# Altium PCB PARK_COUNTER_PT1_UN.PcbDoc
Units mil, origin at the board's own origin, x right, y up, seen from the top; angles counter-clockwise.
Board outline 3592.71 x 2570.03 mil, 2 copper layers (Top Layer, Bottom Layer); 61 components, 33 nets, 168 pads, 120 vias.
Unrouted connection lines stored in the file: 10.
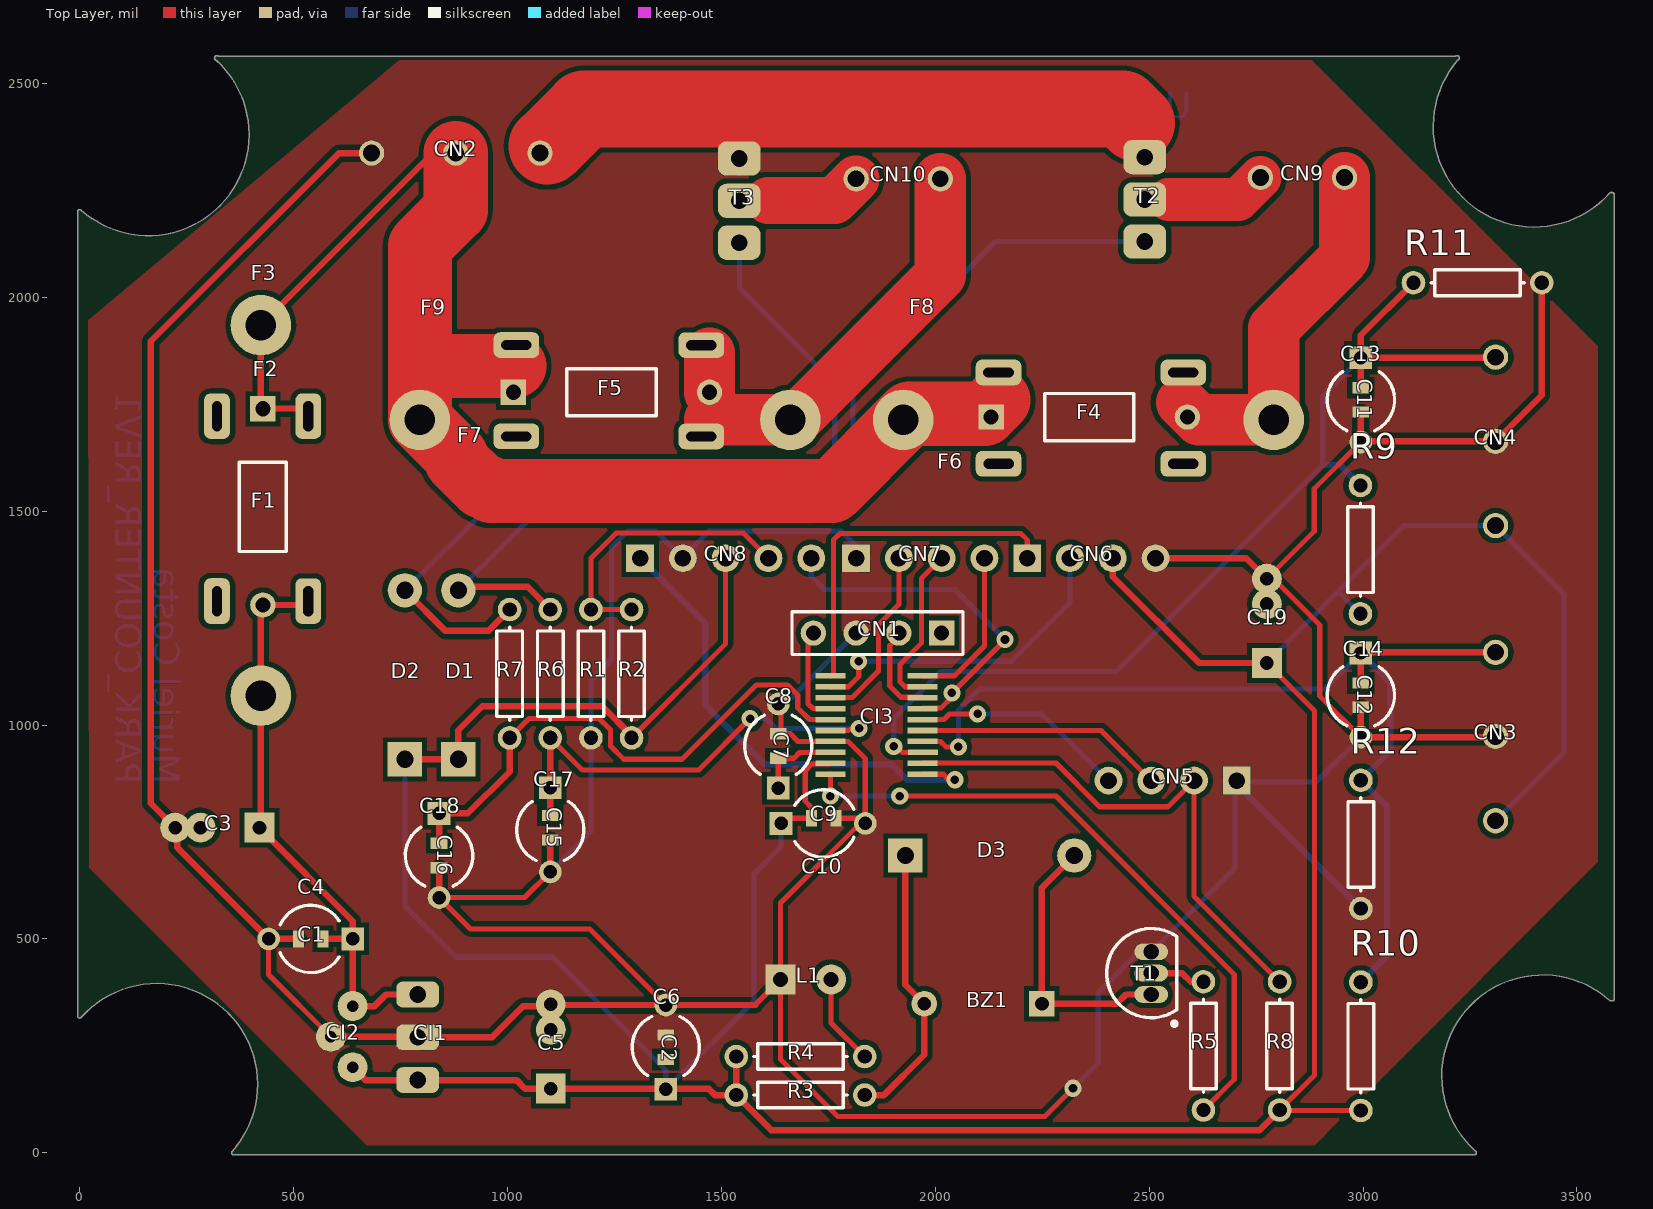
[diagram p0: Top Layer view]
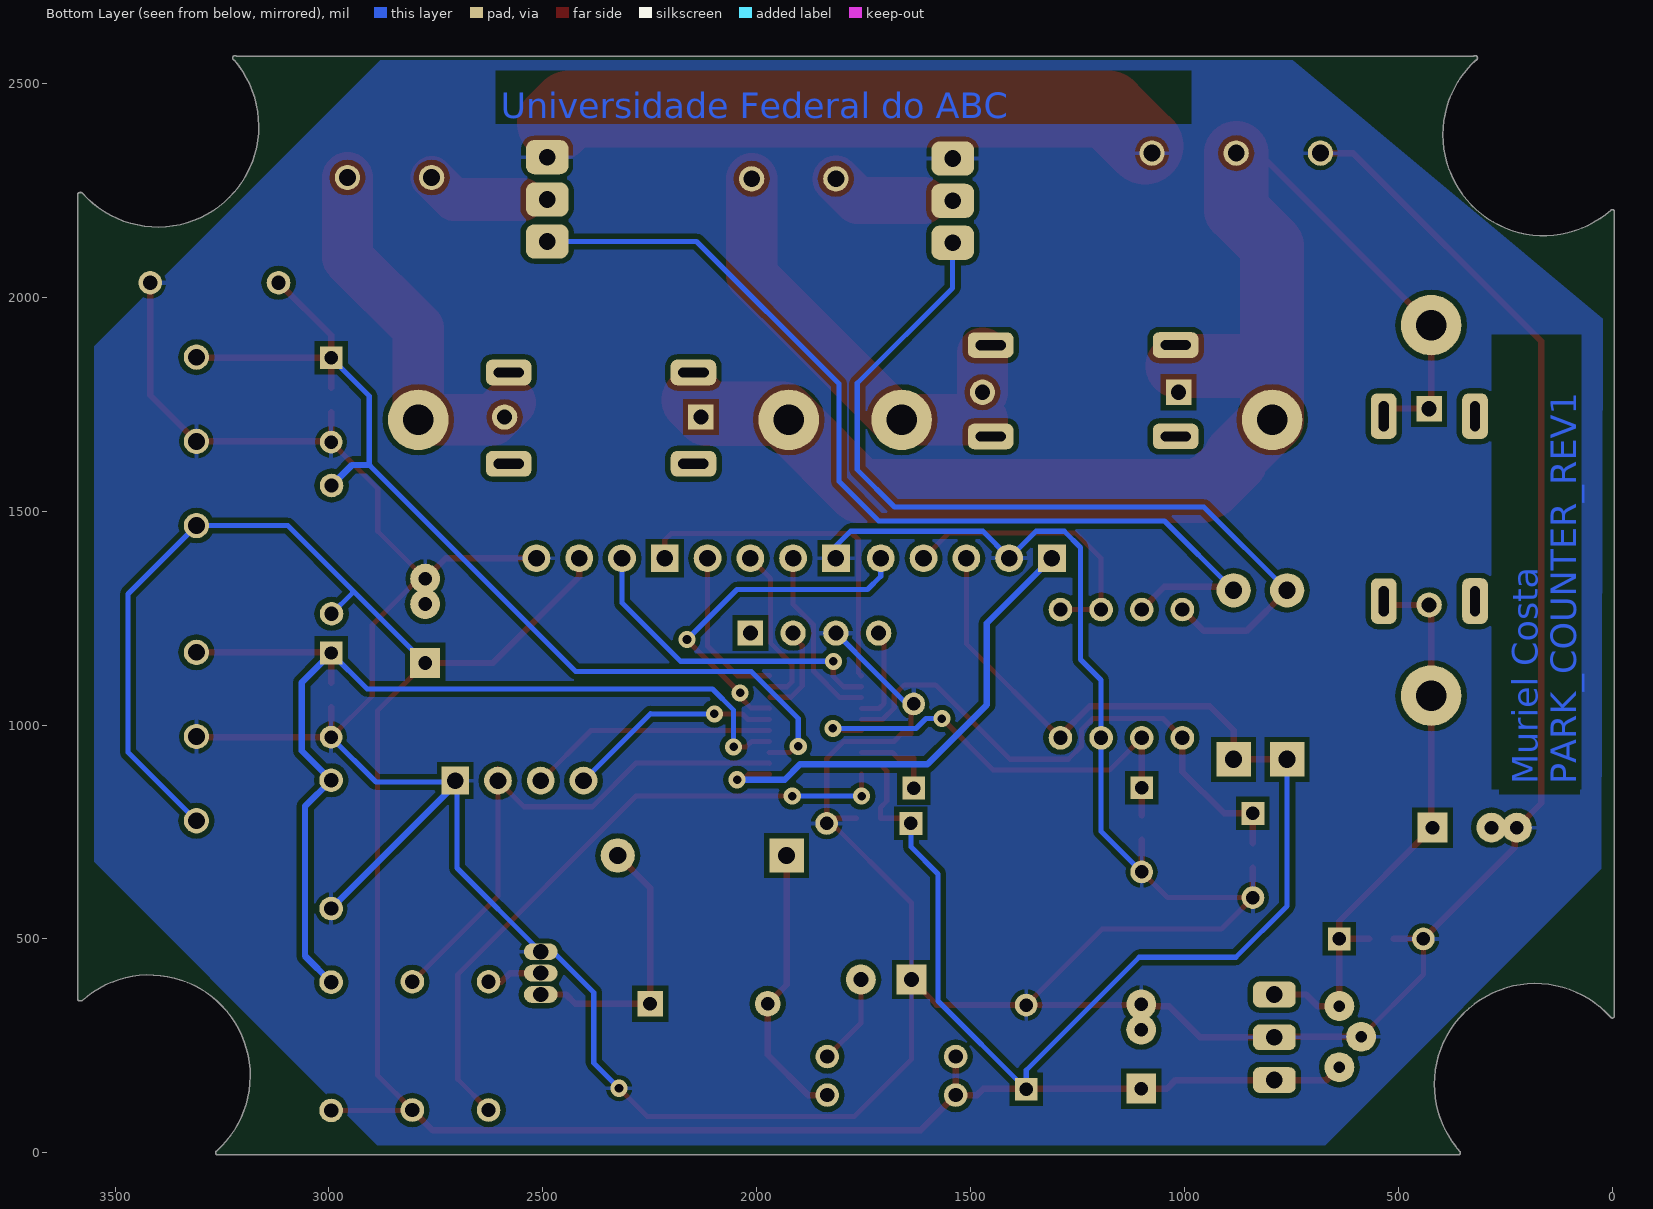
[diagram p1: Bottom Layer view, seen from below]

## Layer stack, top to bottom
Top Solder: solder mask 0.4, Solder Resist, Dk 3.5
Top Layer: signal copper 1.4
Dielectric 1: dielectric 12.6, FR-4, Dk 4.8
Bottom Layer: signal copper 1.4
Bottom Solder: solder mask 0.4, Solder Resist, Dk 3.5

## Board outline
0,314.98 ccw(c0,320) 3.75,316.67 cw(c180,160) 415.82,160 cw(c180,160) 356.25,3.33 ccw(c360,0) 354.98,0 ccw(c360,0) 360,-5.02 3260,-5.01 ccw(c3260,0) 3265.02,0 ccw(c3260,0) 3263.31,3.77 cw(c3420,180) 3576.67,356.25 ccw(c3580,360) 3581.34,355.17 ccw(c3582.68,360) 3587.69,360 3587.69,2240 ccw(c3582.68,2240) 3581.34,2244.83 ccw(c3580,2240) 3576.25,2243.33 cw(c3400,2400) 3221.7,2554.34 ccw(c3220,2559.06) 3225.02,2559.06 ccw(c3220,2559.06) 3224.99,2559.53 ccw(c3220,2560) 3225.02,2560 ccw(c3220,2560) 3217.07,2564.07 322.93,2564.07 ccw(c320,2560) 315.01,2559.53 ccw(c320,2559.05) 319.02,2554.14 cw(c160,2380) 395.82,2380 cw(c160,2380) 3.33,2203.75 ccw(c0,2200) 0,2205.01 ccw(c0,2200) -5.02,2200 -5.02,320 ccw(c0,320)

## Design rules (kind name [scope] priority, off if disabled: settings)
AssemblyTestPointUsage [All] p1 off:
AssemblyTestpoint [All] p1 off: testpointundercomponent=TRUE minsize=40 maxsize=100 preferedsize=60 minholesize=0 maxholesize=40 preferedholesize=32 testpointgrid=1 usegrid=TRUE gridtolerance=0.01 allowsidetop=TRUE allowsidebottom=TRUE
Clearance Clearance_6 [InNamedPolygon('Top Layer-No Net') vs OnLayer('Mechanical 15')] p1: gap=20 ignorepadtopadclearanceinfootprint=FALSE
Clearance Clearance_5 [InNamedPolygon('GND_L02_P002')] p2: gap=10 ignorepadtopadclearanceinfootprint=FALSE except(0: Arc-Hole Track-Hole SMDPad-Hole THPad-Hole Via-Hole Fill-Hole Poly-Hole Region-Hole Text-Hole)
Clearance Clearance_4 [InNamedPolygon('GND_L02_P002') vs OnLayer('Keep-Out Layer')] p3: gap=20 ignorepadtopadclearanceinfootprint=FALSE
Clearance Clearance_3 [OnLayer('Keep-Out Layer')] p4: gap=20 ignorepadtopadclearanceinfootprint=FALSE
Clearance Clearance_2 [InNamedPolygon('Top Layer-No Net') vs OnLayer('Keepout') And OnLayer('mechanical 15')] p5: gap=20 ignorepadtopadclearanceinfootprint=FALSE
Clearance [IsNamedPolygon('Top Layer-No Net') vs OnLayer('Mechanical 15')] p6: gap=20 ignorepadtopadclearanceinfootprint=FALSE
Clearance Clearance_1 [All] p7: gap=12 ignorepadtopadclearanceinfootprint=FALSE
ComponentClearance ComponentClearance_1 [All] p1 off: gap=0 collisioncheckmode=3 verticalgap=0 showdistances=FALSE
FabricationTestPointUsage [All] p1 off: valid=0 allowmultiple=FALSE
FabricationTestpoint [All] p1 off: side=3 testpointundercomponent=TRUE minsize=40 maxsize=100 preferedsize=60 minholesize=0 maxholesize=40 preferedholesize=32 testpointgrid=1 allowsidetop=TRUE allowsidebottom=TRUE usegrid=TRUE gridtolerance=0.01
PolygonConnect PolygonConnect_3 [All vs IsNamedPolygon('Bottom Layer-GND')] p1: thpad.connectstyle=Relief thpad.reliefconductorwidth=10 thpad.reliefentries=2 thpad.polygonreliefangle="90 Angle" thpad.airgapwidth=10 smdpad.connectstyle=Relief smdpad.reliefconductorwidth=10 smdpad.reliefentries=2 smdpad.polygonreliefangle="90 Angle" smdpad.airgapwidth=12 via.connectstyle=Relief via.reliefconductorwidth=10 via.reliefentries=2 via.polygonreliefangle="90 Angle" via.airgapwidth=10
PolygonConnect PolygonConnect_1 [All vs IsNamedPolygon('GND_L01_P002')] p2 off: thpad.connectstyle=Relief thpad.reliefconductorwidth=12 thpad.reliefentries=2 thpad.polygonreliefangle="90 Angle" thpad.airgapwidth=10 smdpad.connectstyle=Relief smdpad.reliefconductorwidth=12 smdpad.reliefentries=2 smdpad.polygonreliefangle="90 Angle" smdpad.airgapwidth=10 via.connectstyle=Relief via.reliefconductorwidth=10 via.reliefentries=2 via.polygonreliefangle="90 Angle" via.airgapwidth=10
RoutingVias [All] p1: holewidth=28 width=50 viastyle="Through Hole" minholewidth=20 minwidth=40 maxholewidth=28 maxwidth=50
SolderMaskExpansion [All] p1: expansion=4
UnpouredPolygon [All] p1: allowunpoured=TRUE allowshelved=TRUE
Width [All] p1: maxlimit=200 minlimit=12 preferedwidth=15
24 further rules are at their usual default settings.

## Classes and differential pairs
component class PARK_COUNTER_PT1_1: C1 C2 C3 C4 C5 C6 C7 C8 C9 C10 C11 C12 C13 C14 C19 CI1 CI2 CI3 CN1 CN2 CN3 CN4 CN5 CN6 CN7 CN8 F1 F2 F3 R1 R2 R8 R9 R10 R11 R12
component class PARK_COUNTER_PT1_2: BZ1 C15 C16 C17 C18 C? CN9 CN10 D1 D2 D3 F4 F5 F6 F7 F8 F9 L1 R3 R4 R5 R6 R7 T1 T2 T3

## Components (designator, comment, footprint, x,y, rotation, side; value= is the part's Value field where it differs from the comment)
BZ1 "5V 12X10" "BUZZER 12mm" 2250,350 r0 top
C1 "C0603" C0603 540,500 r0 top value=100nF
C2 "C0603" C0603 1370,247 r270 top value=100nF
C3 "C_ELET_D8P5_35" C_ELET_D8P5/3.5 420,760 r180 top value=100uF
C4 "Cap2" CAPR5-4X5 540,500 r180 top value=100nF
C5 "C_ELET_D8P5_35" C_ELET_D8P5/3.5 1101,150 r90 top value=470uF
C6 "Cap2" CAPR5-4X5 1370,247 r90 top value=100nF
C7 "C0603" C0603 1633,951 r270 top value=1uF
C8 "Cap2" CAPR5-4X5 1633,951 r90 top value=1uF
C9 "C0603" C0603 1739,782 r180 top value=100nF
C10 "Cap2" CAPR5-4X5 1738,770 r0 top value=100nF
C11 "C0603" C0603 2995,1760 r90 top value=100nF
C12 "C0603" C0603 2995,1070 r90 top value=100nF
C13 "Cap2" CAPR5-4X5 2995,1760 r270 top value=100nF
C14 "Cap2" CAPR5-4X5 2995,1070 r270 top value=100nF
C15 "C0603" C0603 1100,760 r90 top value=100nF
C16 "C0603" C0603 840,695 r90 top value=100nF
C17 "Cap2" CAPR5-4X5 1100,755 r270 top value=100nF
C18 "Cap2" CAPR5-4X5 840,695 r270 top value=100nF
C19 "C_ELET_D8P5_35" C_ELET_D8P5/3.5 2775,1145 r90 top value=470uF
CI1 "7805" CI_7805_TO220_V 790,370 r270 top value={Value}
CI2 "78L05" TO92_78L05 638,200 r180 top
CI3 "CI_STM8S003F3_TSSOP20" TSSOP20 1863,1000 r0 top value=STM8S003F3
CN1 "FLASH / DEBUG" HDR1X4 2015,1215 r180 top
CN2 "KRE Conector 3P" KRE-3P 876,2337 r180 top
CN3 "SENSORES" KRE-3P 3310,970 r270 top
CN4 "SENSORES" KRE-3P 3310,1660 r270 top
CN5 "CON_BP1X4_180" CON_BP1X4_180 2705,870 r180 top value=BOTÕES
CN6 "CON_BP1X4_180" CON_BP1X4_180 2215,1390 r0 top value=LCD
CN7 "CON_BP1X4_180" CON_BP1X4_180 1815,1390 r0 top value=LCD
CN8 "CON_BP1X5_180" CON_BP1X5_180 1310,1390 r0 top value=LCD
CN9 "KRE Conector 2P" KRE-2P 2860,2280 r0 top
CN10 "KRE Conector 2P" KRE-2P 1915,2277 r0 top
D1 "1N400X" DO-35_1 885,920 r90 top value=1N4007
D2 "1N400X" DO-35_1 760,920 r90 top value=1N4007
D3 "1N400X" DO-35_1 1930,695 r0 top value=SB3200
F1 "200mA" PIN-W2/E2.8 428,1510 r270 top
F2 "MINI_FUSE_BOARD_GLASS" MINI_FUSE_BOARD_GLASS 460,1290 r90 top value=200mA
F3 "MINI_FUSE_BOARD_SUP_GLASS" fuse_board_suporte 640,990 r90 top value=200mA
F4 "1A" PIN-W2/E2.8 2360,1720 r0 top
F5 "1A" PIN-W2/E2.8 1243,1778 r0 top
F6 "MINI_FUSE_BOARD_GLASS" MINI_FUSE_BOARD_GLASS 2580,1750 r180 top value=1A
F7 "MINI_FUSE_BOARD_GLASS" MINI_FUSE_BOARD_GLASS 1453,1814 r180 top value=1A
F8 "MINI_FUSE_BOARD_SUP_GLASS" fuse_board_suporte 2870,1930 r180 top value=1A
F9 "MINI_FUSE_BOARD_SUP_GLASS" fuse_board_suporte 1740,1930 r180 top value=1A
L1 "LED5MM_180G" LED5MM_180G 1755,405 r90 top value=Vermelho
R1 "Res1" AXIAL-0.3 1195,1120 r270 top value=1K
R2 "Res1" AXIAL-0.3 1290,1120 r90 top value=1K
R3 "Res1" AXIAL-0.3 1685,135 r180 top value=120R
R4 "Res1" AXIAL-0.3 1685,225 r0 top value=330R
R5 "Res1" AXIAL-0.3 2627,250 r90 top value=1K
R6 "Res1" AXIAL-0.3 1100,1120 r90 top value=1K
R7 "Res1" AXIAL-0.3 1005,1120 r90 top value=1K
R8 "Res1" AXIAL-0.3 2805,250 r270 top value=10K
R9 "Res1" AXIAL-0.3 2994,1410 r270 top value=10K
R10 "Res1" AXIAL-0.3 2995,249 r270 top value=10K
R11 "Res1" AXIAL-0.3 3268,2034 r180 top value=10K
R12 "Res1" AXIAL-0.3 2995,721 r90 top value=10K
T1 "BC548 NPN" TO-226-AA 2505,420 r0 top
T2 "TIP 41" TO-220 2490,2330 r270 top value=TIP41
T3 "TIP 41" TO-220 1542,2327 r270 top value=TIP41

## Footprints (in the part's own frame and the unit in brackets; to place one, negate y for a bottom-side part, rotate by r counter-clockwise, add the part's x,y. Pads: shape width x height; smd on the part's side, far side on the other; paste and mask are expansions set on the pad)
AXIAL-0.3 [mm] "Axial Device, Thru-Hole; 2 Leads; 0.3 in Pin Spacing"
  round 1.4 hole 0.85: 1(-3.81,0) 2(3.81,0)
  silkscreen extent -2.77,-0.76 2.77,0.76
"BUZZER 12mm" [mil] "BUZZER d12mm h10mm p7,5mm - TDYY12-06"
  round 60 hole 32: 1(-275.59,-1.62)
  rect 60x60 hole 32: 2(-0.66,-1.6)
  body extent -375,-239 97,233, height 591
C0603 [mil]
  rect 26x39 smd: 1(-28.53,-0.01) 2(28.53,0.01)
  body extent -41,-18 40,18, height 20
C_ELET_D8P5/3.5 [mil]
  round 70 hole 32: 1(197.09,-0.05) 3(137.8,-0.17)
  rect 70x70 hole 32: 2(0,-0.07)
CAPR5-4X5 [mm] "Capacitor; 2 Leads"
  rect 1.35x1.35 hole 0.8: 1(-2.5,0)
  round 1.35 hole 0.8: 2(2.5,0)
  silkscreen extent -1.69,-2 1.82,2
CI_7805_TO220_V [mil]
  rrect50% 60x100 hole 39: 1(0,-0.04) 2(200,-0.04) 3(100,-0.04)
CON_BP1X4_180 [mil]
  rect 65x65 hole 39: 1(0,0)
  round 65 hole 39: 2(100,0) 3(200,0) 4(300,0)
CON_BP1X5_180 [mil]
  rect 65x65 hole 39: 1(0,0)
  round 65 hole 39: 2(100,0) 3(200,0) 4(300,0) 5(400,0)
DO-35_1 [mil]
  rect 80x80 hole 40: 1(0,0)
  round 80 hole 40: 2(395,0)
  silkscreen extent 98,-47 98,-47
fuse_board_suporte [mm]
  round 3.6 hole 1.8: 1(2,5.5) 2(24,5.5)
HDR1X4 [mm] "Connector; Header; 4 Position"
  rect 1.5x1.5 hole 0.9: 1(0,0)
  round 1.5 hole 0.9: 2(2.54,0) 3(5.08,0) 4(7.62,0)
  silkscreen extent -1.27,-1.27 8.89,1.27
KRE-2P [mm]
  round 1.5 / inner round 1.524 / far side round 1.5 hole 1: 1(-2.54,0) 2(2.46,0)
KRE-3P [mm]
  round 1.5 / inner round 1.524 / far side round 1.5 hole 1: 1(-5.08,0) 2(-0.08,0) 3(4.92,0)
LED5MM_180G [mil]
  round 70 hole 35: 1(0,-1.57)
  rect 70x70 hole 35: 2(0,116.54)
MINI_FUSE_BOARD_GLASS [mm]
  rrect50% 2.706x1.524 hole 0.61: 1(-0.003,-1.885) 2(10.975,-1.887) 3(-0.002,3.538) 4(10.975,3.536)
PIN-W2/E2.8 [mm] "Thru-Hole; 2 Leads"
  rect 1.5x1.5 hole 0.9: 1(-5.825,0)
  round 1.5 hole 0.9: 2(5.825,0)
  silkscreen extent -2.65,-1.4 2.65,1.4
TO92_78L05 [mil]
  round 70 hole 27: 1(-0.03,-142.99) 2(0,0) 3(51.02,-71.26)
TO-220 [mil]
  rrect50% 80x100 hole 39: 1(199.41,-0.04) 2(101.41,-0.04) 3(2.41,-0.04)
TO-226-AA [mm] "TO, Flat Index; 3 In-Line, Axial Leads; Body Dia. 4.8mm; Leads 0.55 x 0.51 mm (max)"
  oval 2x1 hole 0.9: 1(0,-1.27) 2(0,0) 3(0,1.27)
  silkscreen extent -2.65,-3.13 1.52,2.65, body extent -2.65,-2.66 1.52,2.66, height 5.33
TSSOP20 [mil]
  rect 70x13 smd: 1(-107.45,115.16) 2(-107.42,89.56) 3(-107.45,63.98) 4(-107.49,38.39) 5(-107.73,12.8) 6(-107.52,-12.8) 7(-107.87,-38.39) 8(-107.48,-64.1) 9(-107.87,-89.69) 10(-107.87,-115.16) 11(107.48,-115.16) 12(107.48,-89.68) 13(107.87,-64.09) 14(107.48,-38.39) 15(107.56,-12.8) 16(107.53,12.8) 17(107.47,38.39) 18(107.45,63.98) 19(107.45,89.57) 20(107.53,115.14)
  body extent -129,-130 130,130, height 47

## Part data
BZ1: library part BZ_MINI_6V_S/OSC_D12_A10_P7,5, "BUZZER d12mm h10mm p7,5mm", Part Number=009.01.00011
C1 C2 C4 C6 C7 C8 C9 C10 C11 C12 C13 C14 C15 C16 C17 C18 CN5 CN6 CN7: "Capacitor"
  C4 C6 C8 C10 C13 C14 C17 C18: PackageDescription="Capacitor; 2 Leads", PackageReference=CAPR5-4X5, Published=23-Sep-2002, Publisher="Altium Limited"
CI1: library part CI_7805_TO220_V, Part Number=004.02.00002
CI2: library part CI_78L05_TO92, "Glass Zener Diode, 500 Milliwatt", Part Number=004.02.00003
CI3: Part Number=004.07.00026
CN1: library part "Header 4", "Header, 4-Pin", LatestRevisionDate=17-Jul-2002, LatestRevisionNote="Re-released for DXP Platform.", Publisher="Altium Limited"
CN2 CN3 CN4: library part KRE-3P, DeviceSetName=KRE-3P, GateName_1=G$1, LibraryName=kre, Package=KRE-3P, SymbolName_1=KRE-3P
CN9 CN10: library part KRE-2P, DeviceSetName=KRE-2P, GateName_1=G$1, LibraryName=kre, Package=KRE-2P, SymbolName_1=KRE-2P
D1 D2 D3: "Diode"
F1 F4 F5: library part "Fuse 1", "Fuse", LatestRevisionDate=17-Jul-2002, LatestRevisionNote="Re-released for DXP Platform.", PackageDescription="Thru-Hole; 2 Leads", PackageReference=PIN-W2/E2.8, Published=8-Jun-2000, Publisher="Altium Limited"
F2 F6 F7: library part fuse_board_glass
F3 F8 F9: library part fuse_board_suporte
L1: "Light Emitting Diode"
R1 R2 R3 R4 R5 R6 R7 R8 R9 R10 R11 R12: "Resistor", LatestRevisionDate=17-Jul-2002, LatestRevisionNote="Re-released for DXP Platform.", PackageDescription="Axial Device, Thru-Hole; 2 Leads; 0.3 in Pin Spacing", PackageReference=AXIAL-0.3, Published=8-Jun-2000, Publisher="Altium Limited"
T1: library part NPN, "NPN Bipolar Transistor", Code_JEDEC=TO-226-AA, LatestRevisionDate=17-Jul-2002, LatestRevisionNote="Re-released for DXP Platform.", PackageDescription="TO, Flat Index; 3 In-Line, Axial Leads; Body Dia. 4.8mm; Leads 0.55 x 0.51 mm (max)", PackageReference=TO-226-AA, Published=8-Jun-2000, Publisher="Altium Limited"
T2 T3: library part T_TIP41, "NPN Transistor"

## Via types
v1: diameter 24.02, hole 24.02, Top Layer to Bottom Layer, tented both sides, 108 vias
v2: diameter 40, hole 20, Top Layer to Bottom Layer, tented both sides, 12 vias

## Nets (pads, with @x,y where several pads share a name; then routed paths per layer and width w, separated by ;. In a path a pad name is that pad's centre, name@x,y a point inside that pad or via, vN(x,y) a via of type N, cw(c..) or ccw(c..) an arc to the next point about the centre after c; other vN are vias at no path point)
GND: C1.1 C2.1 C3.1 C4.2 C5.1 C6.2 C7.1 C8.2 C9.1 C10.2 C11.1 C12.1 C13.2 C14.2 C15.1 C16.1 C17.2 C18.2 C19.1 CI1.3 CI2.3 CI3.7 CN1.3 CN2.1 CN2.3 CN3.2 CN4.2 CN5.1 CN6.4 CN7.1 CN8.2 L1.2 R1.2 R11.1 R12.1 T1.3 T2.3 T3.3 | length 13785.7
  Top Layer w12: C4.2 441.57,416.67 CI2.3 ; C17.2 1040,596.57 C18.2 913.57,523 1192.43,523 C6.2 ; 1578.89,345.43 L1.2 ; C8.2@1638.99,1049.42 1638.99,979.53 1661.47,979.53 1679.39,961.61 CI3.7 1796.76,961.61 1836.43,921.95 1836.43,782 1638.46,584.04 L1.2 ; C9.1 C10.2@1836.42,782.01 ; v2(2322,151) 2256,85 1772,85 1638.46,218.54 L1.2 ; C14.2 2899,1067.57 2899,1233.92 2797.12,1335.8 2781.35,1335.8 C19.1 2886,1453.04 2886,1552.57 C13.2
  Top Layer w15: C4.2 227.7,713.87 227.7,755.26 C3.1 166,816.96 166,1897 606,2337 CN2.3 ; C4.2 C1.1 ; CI2.3 CI1.3@788.69,271.26 ; CI1.3 963.86,270 1036.15,342.3 C5.1@1096.26,342.3 ; C18.2 C16.1 ; C17.2 C15.1 ; C5.1@1102.72,345.43 C6.2 1578.89,345.43 ; CN6.4 2727.14,1390 C19.1 ; C14.2 CN3.2@3308.42,971.57 ; C14.2 C12.1 ; C11.1 C13.2 2996.57,1663.15 CN4.2 3418,1771.15 R11.1
  Top Layer w180: CN2.1@1092.5,2353.5 1179,2440 2438,2440 2470,2408
  Bottom Layer w12: C17.2 1195,751.58 R1.2 1195,1105 1243,1153 1243,1415 1281,1453 1347,1453 CN8.2 1410,1392 1471,1453 1781,1453 1815,1419 CN7.1 ; C8.2 1649.43,1049.43 1740,1140 CN1.3@1798.61,1198.61 ; v2(2322,151) 2381,210 2381,375 2476,470 T1.3 2701,666 2701,859.15 2705,863.15 2708.43,866.58 2890,866.58 C14.2
  Bottom Layer w15: CN5.1 2705,863.15 2705,861 R12.1
NetBZ1_1: BZ1.1 D3.1 R3.1 | length 662.5
  Top Layer w15: R3.1 1880,135 1974.41,229.41 BZ1.1 1930,392.79 D3.1
NetBZ1_2: BZ1.2 D3.2 T1.1 | length 642.5
  Top Layer w15: D3.2 2249.34,619.34 BZ1.2 2424.4,348.4 2446,370 T1.1
NetC1_2: C1.2 C3.2 C4.1 CI1.1 CI2.1 F1.2 F2.1 F3.1 | length 1366.2
  Top Layer w15: F2.1@524.97,1280.67 F1.2 423.46,1276.13 F3.1 423.46,763.54 C3.2 638.43,541.65 C4.1 ; C1.2 C4.1 ; CI2.1 CI2.1@650.03,342.99 ; CI1.1 716,370 688.99,342.99 CI2.1@650.03,342.99 ; C4.1 638.43,354.6 CI2.1@650.03,342.99
  other v1: 534.2,1266.22 534.2,1272.09 534.2,1277.95 534.2,1283.78 534.2,1289.89 534.2,1296.14 534.2,1301.97 534.2,1307.8 534.2,1313.62
NetC2_2: C2.2 C5.2 C6.1 C9.2 C10.1 C19.2 CI1.2 CI2.2 CI3.9 CN1.1 CN3.3 CN4.3 CN6.3 CN8.3 D1.1 D2.1 R2.1 R3.2 R4.1 R8.2 R9.2 R10.2 | length 9020.7
  Top Layer w12: R2.1 1510,1190 CN8.3 ; C10.1@1639.57,782 C9.2 1710.46,807.54 1696,822 1696,892.67 1712.67,909.34 1754.16,909.34 CI3.9 ; C19.2 2887,1033.07 2887,182 R8.2 ; R8.2@2806,99 R10.2
  Top Layer w15: CI2.2 668,170 CI1.2 1021,170 1041,150 C5.2 1470,150 1485,135 R3.2 ; D2.1 D1.1 885,988 941,1044 1221.49,1044 1290,975.49 R2.1 ; R4.1 R3.2 ; CN6.3 2415,1347 2617,1145 C19.2 ; R8.2 2757.94,52.94 1617.06,52.94 R3.2
  Bottom Layer w12: D2.1 760,577 880,457 1106,457 1370,193 C6.1 1576,354.58 1576,652 1639.57,715.57 C10.1@1639.57,782 ; C19.2 3096.38,1466.3 CN4.3 3470,1306.3 3470,936.3 CN3.3 ; 2944.54,1309.46 R9.2
NetC7_2: C7.2 C8.1 CI3.8 | length 200.5
  Top Layer w12: C8.1@1639,852.57 1633,858.57 C7.2 1669.47,922.47 1682.9,935.9 CI3.8
NetC11_2: C11.2 C13.1 CI3.13 CN4.1 R9.1 R11.2 | length 2383.5
  Top Layer w12: v2@1911,948 1923.09,935.91 CI3.13
  Top Layer w15: C11.2 C13.1 ; R11.2 2995,1911 C13.1 CN4.1@3308.43,1858.43
  Bottom Layer w12: v2(1903,950) 1903,1015 2013,1125 2423,1125 2906,1608 2906,1769.43 C13.1
  Bottom Layer w15: 2906,1608 2946,1608 R9.1
NetC12_2: C12.2 C14.1 CI3.14 CN3.1 R10.1 R12.2 | length 2431.3
  Top Layer w12: CI3.14 2012.12,961.61 2024.74,949 v2(2054,949)
  Top Layer w15: C12.2 C14.1 ; C14.1@2996.57,1170 CN3.1
  Bottom Layer w12: v2(2054,949) 2054,1034.74 2103.26,1084 2910.57,1084 C14.1
  Bottom Layer w15: R10.1 3056,460 3056,810 R12.2 3064,940 3064,1099.43 C14.1
NetC15_2: C15.2 C17.1 CI3.6 R6.1 | length 1069.4
  Top Layer w12: R6.1 1175,895 1447,895 v2(1567,1015) ; CI3.6 1796.63,987.2 1799.43,990 v2@1820,990
  Top Layer w15: C15.2 C17.1 ; C17.1 R6.1
  Bottom Layer w12: v2(1567,1015) 1604.39,1015 1627.39,992 v2(1822,992) v2@1822,982
NetC16_2: C16.2 C18.1 CI3.5 R7.1 | length 1308.7
  Top Layer w12: R7.1 1050.56,1015.56 1213.87,1015.56 1240.56,988.87 1240.56,951.13 1271.69,920 1408,920 1582,1094 1655,1094 1678.55,1070.45 1678.55,1040.08 1705.83,1012.8 CI3.5
  Top Layer w15: C16.2 C18.1 ; C18.1 907.43,793.43 1005,891 R7.1
NetCI3_1: CI3.1 CN6.1 | length 828.9
  Top Layer w12: CI3.1 1762.53,1122.14 1762.53,1433.53 1777,1448 2200,1448 2215,1433 CN6.1
NetCI3_2: CI3.2 CN6.2 | length 765.5
  Top Layer w12: CI3.2 1796.91,1089.56 1821,1113.66 v2(1821,1149)
  Bottom Layer w12: v2(1821,1149) 2178,1149 2315,1286 CN6.2
NetCI3_3: CI3.3 CN7.2 | length 421.2
  Top Layer w12: CI3.3 1805.26,1063.98 1867.47,1126.19 1867.47,1234.69 1915,1282.21 CN7.2
NetCI3_4: CI3.4 CN1.4 | length 228
  Top Layer w12: 1702.55,1077.93 1702.55,1050.02 1714.18,1038.39 CI3.4 ; 1702.55,1101.2 1702.55,1202.55 CN1.4 ; 1702.58,1077.96 1702.58,1101.17
NetCI3_10: CI3.10 R5.1 | length 1499.5
  Top Layer w12: v2@1755.13,848.87 CI3.10 ; v2(1917,834) 2282,834 2699,417 2699,172 R5.1
  Bottom Layer w12: v2(1755,834) v2(1917,834)
NetCI3_11: CI3.11 CN8.1 | length 1151.5
  Top Layer w12: CI3.11 2019.16,884.84 2030,874 v2@2055,874
  Bottom Layer w15: CN8.1 1462,1238 1462,1047 1601,908 1898.86,908 1934.86,872 v2(2046,872)
NetCI3_12: CI3.12 CN5.2 R8.1 | length 1283.2
  Top Layer w12: CI3.12 1971.17,911 2282,911 2384,809 2544,809 CN5.2 ; CN5.2@2605,898 CN5.2 ; R8.1 2605,600 CN5.2
NetCI3_15: CI3.15 CN5.3 | length 583
  Top Layer w12: CI3.15 2387.8,987.2 CN5.3
NetCI3_16: CI3.16 CN5.4 | length 505.4
  Top Layer w12: CI3.16 2020.16,1012.8 2033.37,1026 v2(2099,1026)
  Bottom Layer w12: v2(2099,1026) 2247,1026 2248,1027 CN5.4
NetCI3_17: CI3.17 CN8.5 | length 822.3
  Top Layer w12: CI3.17 1971.56,1039.48 2012.9,1039.48 2039,1065.58 v2(2039,1075) v2@2164,1200
  Bottom Layer w12: CN8.5 1710,1348 1741,1317 2046,1317 v2(2163,1200)
NetCI3_18: CI3.18 CN1.2 | length 219.3
  Top Layer w12: CN1.2 1915,1207 1893.53,1185.53 1893.53,1091.24 1919.71,1065.07 CI3.18@1969.35,1065.07
NetCI3_19: CI3.19 CN7.3 | length 386.9
  Top Layer w12: CI3.19 1929.15,1089.57 1917.53,1101.19 1917.53,1141.53 1967.47,1191.47 1967.47,1342.47 CN7.3
NetCI3_20: CI3.20 CN7.4 | length 378.4
  Top Layer w12: CI3.20 2045.14,1115.14 2115,1185 CN7.4
NetCN2_2: CN2.2 F1.1 F2.2 F3.2 F4.1 F5.1 F6.2 F7.2 F8.2 F9.2 | length 3263.9
  Top Layer w15: v1(534.29,1739.95) 429.38,1739.95 423.46,1745.87 F3.2 825.58,2337 CN2.2
  Top Layer w150: 851.12,1839 1003.05,1839 1013.67,1839 1016,1839 ; CN2.2 879.15,2204.15 795.12,2120.12 F9.2 880.63,1627.96 880.63,1617.55 940.38,1557.8 950.78,1557.8 961.58,1547 1758.65,1547 F8.2 1939.46,1727.8 2115.8,1727.8 2148,1760
  other v1: 534.29,1698.42 534.29,1704.24 534.29,1710.07 534.29,1715.9 534.29,1722.08 534.29,1728.26 534.29,1734.09 534.29,1745.82 2124.18,1824.29 2130.05,1824.29 2135.91,1824.29 2141.74,1824.29 2147.92,1824.29 2154.1,1824.29 2159.93,1824.29 2165.76,1824.29 2171.58,1824.29 997.18,1888.29 1003.05,1888.29 1008.91,1888.29 1014.74,1888.29 1020.92,1888.29 1027.1,1888.29 1032.93,1888.29 1038.76,1888.29 1044.58,1888.29
NetCN8_4: CN8.4 R1.1 R2.2 | length 678.9
  Top Layer w12: R2.2 R1.1 1195,1390 1254,1449 1551,1449 CN8.4
NetCN9_1: CN9.1 T2.2 | length 235.5
  Top Layer w100: 2545.75,2228.59 2708.59,2228.59 CN9.1
NetCN9_2: CN9.2 F4.2 F6.1 F8.1 | length 867.2
  Top Layer w120: 2576,1754 2616.54,1713.46 F8.1 2791.26,1927.26 2956.85,2092.85 CN9.2
  other v1: 2556.38,1824.2 2562.2,1824.2 2568.03,1824.2 2573.86,1824.2 2580.11,1824.2 2586.22,1824.2 2592.05,1824.2 2597.91,1824.2 2603.78,1824.2
NetCN10_1: CN10.1 T3.2 | length 226.1
  Top Layer w110: 1610,2226.09 1764.09,2226.09 CN10.1
NetCN10_2: CN10.2 F5.2 F7.1 F9.1 | length 995.8
  Top Layer w120: 1472.33,1713.46 F9.1 1673.46,1713.46 2011.85,2051.85 CN10.2 ; F5.2 F7.1@1472.33,1868.97
  other v1: 1429.42,1674.71 1435.24,1674.71 1441.07,1674.71 1446.9,1674.71 1453.08,1674.71 1459.26,1674.71 1465.09,1674.71 1470.95,1674.71 1476.82,1674.71 1429.38,1888.2 1435.2,1888.2 1441.03,1888.2 1446.86,1888.2 1453.11,1888.2 1459.22,1888.2 1465.05,1888.2 1470.91,1888.2 1476.78,1888.2
NetD1_2: D1.2 R6.2 T2.1 | length 2316.6
  Top Layer w12: D1.2 D1.2@893,1323
  Top Layer w15: D1.2@893,1323 1047,1323 R6.2
  Bottom Layer w12: D1.2 1047,1477 1715,1477 1808,1570 1808,1798 2140.59,2130.59 T2.1
NetD2_2: D2.2 R7.2 T3.1 | length 2049.8
  Top Layer w15: D2.2 855,1220 955,1220 R7.2
  Bottom Layer w12: D2.2 955,1510 1678,1510 1765,1597 1765,1799 1541.96,2022.04 T3.1
NetL1_1: L1.1 R4.2 | length 212.5
  Top Layer w12: L1.1 1756.57,303.43 R4.2
NetR5_2: R5.2 T1.2 | length 130.3
  Top Layer w15: T1.2 2577,420 2597,400 R5.2
pads on no net: C3.3 C5.3 C19.3 F2.3 F2.4 F6.3 F6.4 F7.3 F7.4
copper on no net:
  other v1: 320.71,1266.18 320.71,1272.05 320.71,1277.91 320.71,1283.74 320.71,1289.92 320.71,1296.1 320.71,1301.93 320.71,1307.76 320.71,1313.58 2124.22,1610.8 2130.09,1610.8 2135.95,1610.8 2141.78,1610.8 2147.89,1610.8 2154.14,1610.8 2159.97,1610.8 2165.8,1610.8 2171.62,1610.8 2556.42,1610.71 2562.24,1610.71 2568.07,1610.71 2573.9,1610.71 2580.08,1610.71 2586.26,1610.71 2592.09,1610.71 2597.95,1610.71 2603.82,1610.71 997.22,1674.8 1003.09,1674.8 1008.95,1674.8 1014.78,1674.8 1020.89,1674.8 1027.14,1674.8 1032.97,1674.8 1038.8,1674.8 1044.62,1674.8 320.8,1698.38 320.8,1704.2 320.8,1710.03 320.8,1715.86 320.8,1722.11 320.8,1728.22 320.8,1734.05 320.8,1739.91 320.8,1745.78

## Polygon pours and split planes (outlines as drawn)
GND on Top Layer "Top Layer-No Net 1" (solid, pour order 2): 19.7,1946.87 747.29,2554.34 2880.66,2554.34 3549,1886 3549,680 2887,18 671,18 22.32,666.68
GND on Bottom Layer "Bottom Layer-GND" (solid, pour order 6): 22.69,1949.36 747.29,2554.34 2880.66,2554.34 3549,1886 3549,680 2887,18 671,18 25.32,663.68

## Other copper
Bottom Layer:
  pour cut-out: 991,2515 991,2418 2598,2418 2598,2515
  pour cut-out: 264,1889 76,1889 76,838 264,838
  text "Universidade Federal do ABC" at 2598,2418 h60
  text "Muriel Costa / PARK_COUNTER_REV1" at 84,862 h60 r270

## Silkscreen, mask and mechanical layers (free items; w line width, h text height)
Mechanical 15:
  lines w10: 320,2559.05 3220,2559.06 ; 320,2560 cw(c160,2380) 0,2200 0,320 cw(c180,160) 360,0 3260,0 cw(c3420,180) 3580,360 ; 3220,2560 ccw(c3400,2400) 3580,2240 ; 3582.68,360 3582.68,2240